# EAGLE board Sound Activated PCB (EAGLE 9.7.0)
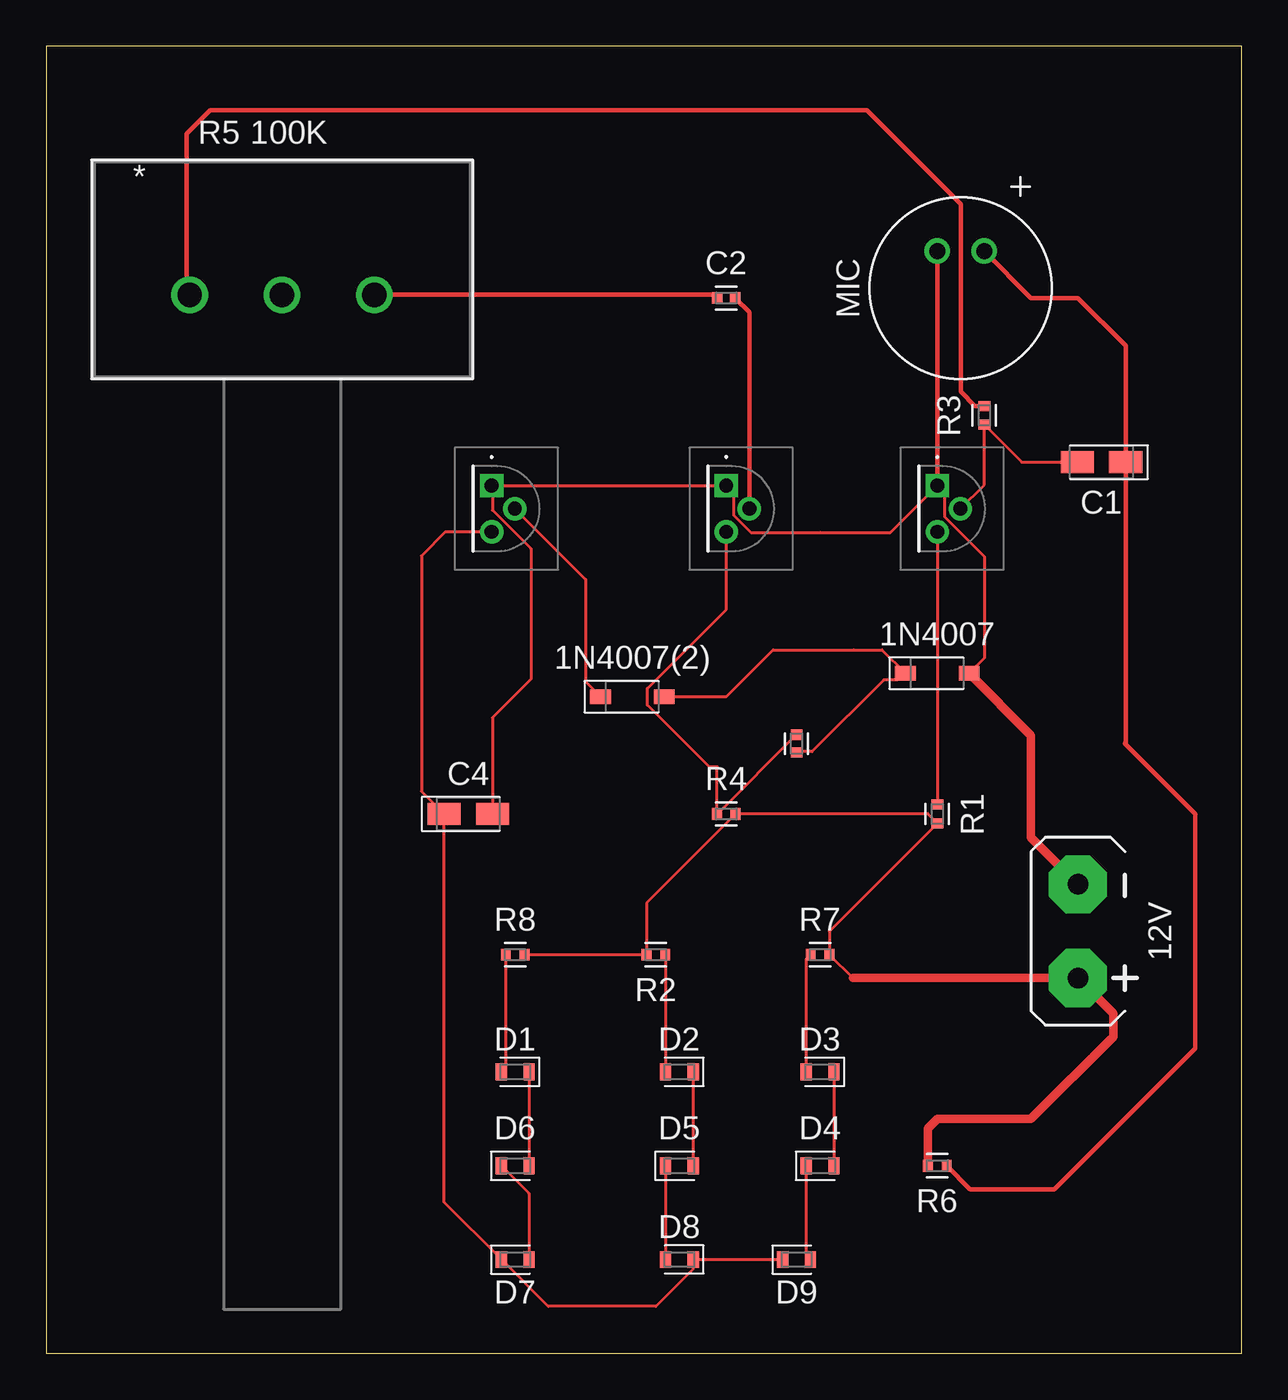
[diagram p0: board, top side]

Size 64.75 x 70.79 mm. Coordinates in mm from the lower left corner, seen from the top.
Outline: 0,0 64.75,0 64.75,70.79 0,70.79 0,0
Copper layers (1*16): Top 0.035mm / dielectric 1.5mm / Bottom 0.035mm
Design rules "Fusion Electronics Design Rules": minimum track width 6mil, minimum drill 0.35mm, track to track 6mil, track to pad 6mil, pad to pad 6mil, via to via 6mil, smd to smd 6mil, copper to edge 40mil, drill to drill 6mil, minimum pad ring 10mil, minimum via ring 8mil, stop-mask expansion 4mil, vias tented up to drill 9999mil, thermal gap 10mil

## Footprints (pad centres in the part's own frame; a part is rotated, then mirrored left to right if it is on the bottom)
SOD3715X135 = smd 1.127 x 0.784: 1 -1.722,0; 2 1.722,0
BATTERY-GENERIC = drill 1.118 pad 3.15 octagon: + 2.54,0; - -2.54,0
CAPMP3216X180N = smd 1.796 x 1.189: 1 -1.31,0; 2 1.31,0
CAPC1005X60 = smd 0.56 x 0.629: 1 -0.485,0; 2 0.485,0
LEDC1608X65N_RND-R = smd 0.612 x 0.912: A 0.75,0; C -0.75,0
CMA-4544PF-W = drill 0.87: 1 0,-2.54; 2 0,0
2N4401T = drill 0.75 pad 1.2 square: 1 0,0 | drill 0.75 pad 1.2: 2 1.25,1.25; 3 2.5,0
RESC1005X40 = smd 0.535 x 0.644: 1 -0.507,0; 2 0.507,0
POT_1623757-2 = drill 1.321 pad 1.829: 1 -10.008,-12.522; 2 -5.004,-12.522; 3 0,-12.522

## Placement (x,y rotation side)
1N4007  DIODE_1N4148W-7-F_SOD123G  [SOD3715X135]  48.26,36.83 0 top
1N4007(2)  DIODE_1N4148W-7-F_SOD123G  [SOD3715X135]  31.75,35.56 0 top
12V  BATTERYGENERIC  [BATTERY-GENERIC]  55.88,22.86 270 top
C1  100nF  [CAPMP3216X180N]  57.15,48.26 180 top
C2  100nF  [CAPC1005X60]  36.83,57.15 0 top
C3  0.1u  [CAPC1005X60]  40.64,33.02 270 top
C4  1u  [CAPMP3216X180N]  22.86,29.21 0 top
D1  CHIP-ROUND-R_0603  [LEDC1608X65N_RND-R]  25.4,15.24 180 top
D2  CHIP-ROUND-R_0603  [LEDC1608X65N_RND-R]  34.29,15.24 180 top
D3  CHIP-ROUND-R_0603  [LEDC1608X65N_RND-R]  41.91,15.24 180 top
D4  CHIP-ROUND-R_0603  [LEDC1608X65N_RND-R]  41.91,10.16 0 top
D5  CHIP-ROUND-R_0603  [LEDC1608X65N_RND-R]  34.29,10.16 0 top
D6  CHIP-ROUND-R_0603  [LEDC1608X65N_RND-R]  25.4,10.16 0 top
D7  CHIP-ROUND-R_0603  [LEDC1608X65N_RND-R]  25.4,5.08 0 top
D8  CHIP-ROUND-R_0603  [LEDC1608X65N_RND-R]  34.29,5.08 180 top
D9  CHIP-ROUND-R_0603  [LEDC1608X65N_RND-R]  40.64,5.08 0 top
MIC  CMA-4544PF-W  [CMA-4544PF-W]  48.26,59.69 90 top
Q1  2N4401-T  [2N4401T]  48.26,46.99 270 top
Q2  2N4401-T  [2N4401T]  36.83,46.99 270 top
Q3  2N4401-T  [2N4401T]  24.13,46.99 270 top
R1  220K  [RESC1005X40]  48.26,29.21 270 top
R2  470  [RESC1005X40]  33.02,21.59 180 top
R3  660K  [RESC1005X40]  50.8,50.8 90 top
R4  1.2K  [RESC1005X40]  36.83,29.21 0 top
R5  100K  [POT_1623757-2]  17.78,69.85 0 top
R6  10K  [RESC1005X40]  48.26,10.16 180 top
R7  470  [RESC1005X40]  41.91,21.59 0 top
R8  470  [RESC1005X40]  25.4,21.59 0 top

## Library data of the parts
1N4007 1N4007(2) = Diode; CATEGORY: Diode; DATASHEET: https://www.diodes.com/datasheet/download/1N4148W.pdf; DESCRIPTION: Diode 100 V 300mA Surface Mount SOD-123; FORWARD_CURRENT: 150mA; FORWARD_VOLTAGE: 1.25V; MANUFACTURER: Diodes Incorporated; MPN: 1N4148W-7-F; OPERATING_TEMPERATURE: -55°C ~ 150°C; PACKAGE_SIZE: SOD-123; PACKAGE_TYPE: SMD; PART_STATUS: ACTIVE; REVERSE_VOLTAGE: 100V; ROHS: COMPLIANT; SERIES: 1N4148; SUBCATEGORY: Rectifiers; TYPE: Small Signal Switching Diodes; ZENER_VOLTAGE: NA
12V = Tinkercad
C1 C4 = Capacitor; CATEGORY: Capacitor; PACKAGE_SIZE: 1206; PACKAGE_TYPE: SMD; SUBCATEGORY: Tantalum Capacitors; TYPE: Polymer Capacitors
C2 C3 = Capacitor; CATEGORY: Capacitor; PACKAGE_SIZE: 0402; PACKAGE_TYPE: SMD; SUBCATEGORY: Ceramic Capacitors; TYPE: MLCC
D1-D9 = LED; CATEGORY: LED; COLOR: Red; DESCRIPTION: Red LED Indication 0603 (1608 Metric); PACKAGE_SIZE: 0603; PACKAGE_TYPE: SMD; SUBCATEGORY: Chip LED; TYPE: Square with Domed Top
MIC = Audio-Devices; CATEGORY: Audio-Devices; DATASHEET: https://www.sameskydevices.com/product/resource/cma-4544pf-w.pdf; DESCRIPTION: 20 Hz ~ 20 kHz Analog Microphone Electret Condenser 3 V ~ 10 V Omnidirectional (-44dB ±2dB) PC Pins; MANUFACTURER: Same Sky; MPN: CMA-4544PF-W; OPERATING_TEMPERATURE: NA; PACKAGE_SIZE: NA; PACKAGE_TYPE: THT; PART_STATUS: ACTIVE; ROHS: COMPLIANT; SERIES: NA; SUBCATEGORY: Microphone; TYPE: Electret Condenser
Q1-Q3 = 2N4401-T; DESCRIPTION: Bipolar Transistors - BJT NPN 0.6A 40V Gen Pur; HEIGHT: 4.6mm; MANUFACTURER_NAME: Rectron; MANUFACTURER_PART_NUMBER: 2N4401-T; MOUSER_PART_NUMBER: 583-2N4401-T; MOUSER_PRICE-STOCK: https://www.mouser.co.uk/ProductDetail/Rectron/2N4401-T?qs=FOlmdCx%252BAA2PuSUxt27Oyw%3D%3D
R1-R4 R6-R8 = Resistor; CATEGORY: Resistors; DESCRIPTION: Chip Resistor 1.05 X 0.54 X 0.40 mm body 0402(1005-METRIC) Package; PACKAGE_SIZE: 0402; PACKAGE_TYPE: SMD
R5 = Resistors; BUILT_BY: EMA_UL_Team; CATEGORY: Potentiometers; COPYRIGHT: Copyright (C) 2016 Accelerated Designs. All rights reserved; DESCRIPTION: 23E 10KA 6.35X50FL B7 CAT; MANUFACTURER_PART_NUMBER: 23ESA103MMF50NF; PART_STATUS: active; SERIES: Unknown; VENDOR: TE Connectivity

## Nets
N$1: C1.1 MIC.1 R6.1
N$2: D1.A R8.1
N$3: Q1.3 R1.1
N$4: 1N4007.2 12V.- C4.2 MIC.2 Q1.1 Q2.1 Q3.1
N$5: C1.2 Q1.2 R3.1
N$6: R3.2 R5.1
N$7: C2.1 R5.3
N$8: C2.2 Q2.2
N$9: C3.1 Q2.3 R4.1
N$10: 12V.+ R1.2 R2.2 R4.2 R6.2 R7.2 R8.2
N$11: D2.A R2.1
N$12: D3.A R7.1
N$13: D1.C D6.A
N$14: D2.C D5.A
N$15: D3.C D4.A
N$16: D6.C D7.A
N$17: D5.C D8.A
N$18: D4.C D9.A
N$19: C4.1 D7.C D8.C D9.C Q3.3
N$20: 1N4007(2).2 1N4007.1 C3.2
N$21: 1N4007(2).1 Q3.2

## Tracks (layer width: path | path; a pad name or v marks a point on that pad's centre or on a via)
N$1
  Top 0.152: 58.46,33.06 58.42,33.02
  Top 0.254: MIC.1 53.34,57.15 55.88,57.15 58.46,54.57 C1.1 58.46,33.06 | 58.42,33.02 62.23,29.21 62.23,16.51 54.61,8.89 50.04,8.89 R6.1
N$2
  Top 0.152: R8.1 24.89,15.48 D1.A
N$3
  Top 0.152: Q1.3 R1.1
N$4
  Top 0.152: C4.2 24.17,34.43 26.26,36.52 26.26,43.58 24.17,45.66 24.17,46.95 Q3.1 Q2.1 37.22,46.6 37.22,45.38 38.16,44.45 41.91,44.45 45.72,44.45 Q1.1 48.65,46.6 48.65,45.31 50.8,43.16 50.8,37.65 1N4007.2
  Top 0.254: MIC.2 Q1.1
  Top 0.457: 1N4007.2 53.34,33.47 53.34,27.94 12V.-
N$5
  Top 0.152: Q1.2 50.8,47.03 R3.1 52.83,48.26 C1.2
N$6
  Top 0.152: R5.1 7.62,57.48
  Top 0.254: R3.2 50.29,51.31 49.53,52.07 49.53,62.23 44.45,67.31 8.89,67.31 7.62,66.04 7.62,57.48
N$7
  Top 0.152: 36.17,57.33 C2.1
  Top 0.254: R5.3 36.17,57.33
N$8
  Top 0.254: Q2.2 38.08,56.38 C2.2
N$9
  Top 0.152: C3.1 36.34,29.21 R4.1 36.32,31.73 36.37,31.75 35.92,31.75 32.56,35.1 32.56,36.02 36.83,40.28 36.83,44.4 Q2.3
N$10
  Top 0.152: 43.69,20.32 R7.2 42.42,22.86 R1.2 47.75,29.21 R4.2 32.51,24.39 R2.2 R8.2
  Top 0.457: 43.69,20.32 12V.+ 57.78,18.41 57.78,17.14 53.34,12.7 48.26,12.7 47.75,12.19 R6.2
N$11
  Top 0.152: R2.1 33.54,21.58 D2.A
N$12
  Top 0.152: R7.1 41.16,21.35 D3.A
N$13
  Top 0.152: D1.C D6.A
N$14
  Top 0.152: D2.C D5.A
N$15
  Top 0.152: D3.C D4.A
N$16
  Top 0.152: D6.C 26.15,8.66 D7.A
N$17
  Top 0.152: D5.C D8.A
N$18
  Top 0.152: D4.C 41.16,5.31 D9.A
N$19
  Top 0.152: D9.C D8.C 35.04,4.56 33.02,2.54 27.19,2.54 D7.C 21.55,8.18 C4.1 20.32,30.44 20.32,43.18 21.63,44.49 Q3.3
N$20
  Top 0.152: 1N4007(2).2 36.58,35.56 36.83,35.56 39.37,38.1 43.74,38.1 45.27,38.1 1N4007.1 46.43,36.78 46.13,36.47 45.36,36.47 41.48,32.59 40.64,32.59 C3.2
N$21
  Top 0.152: Q3.2 25.4,45.72 29.21,41.91 29.21,36.38 1N4007(2).1